# EAGLE board clock_PC_and_instruction_reg (EAGLE 9.6.1), part 1 of 2
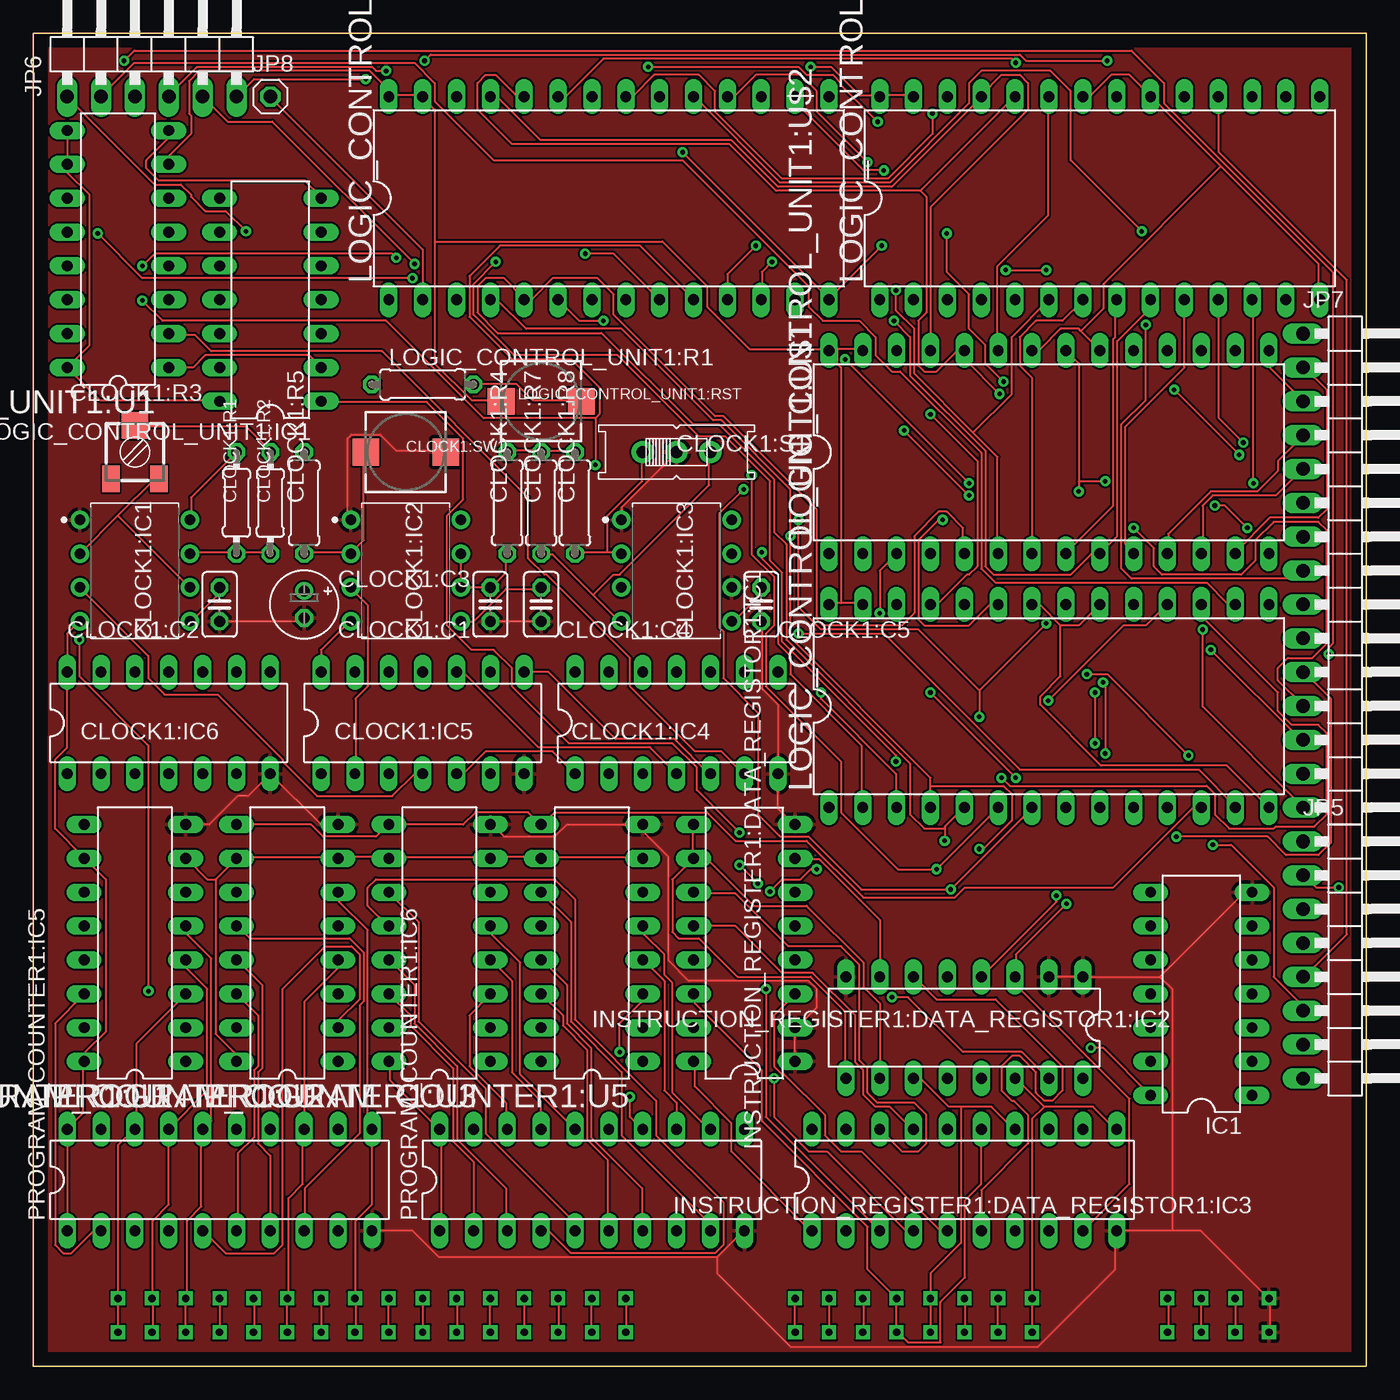
[diagram p0: board, top side]
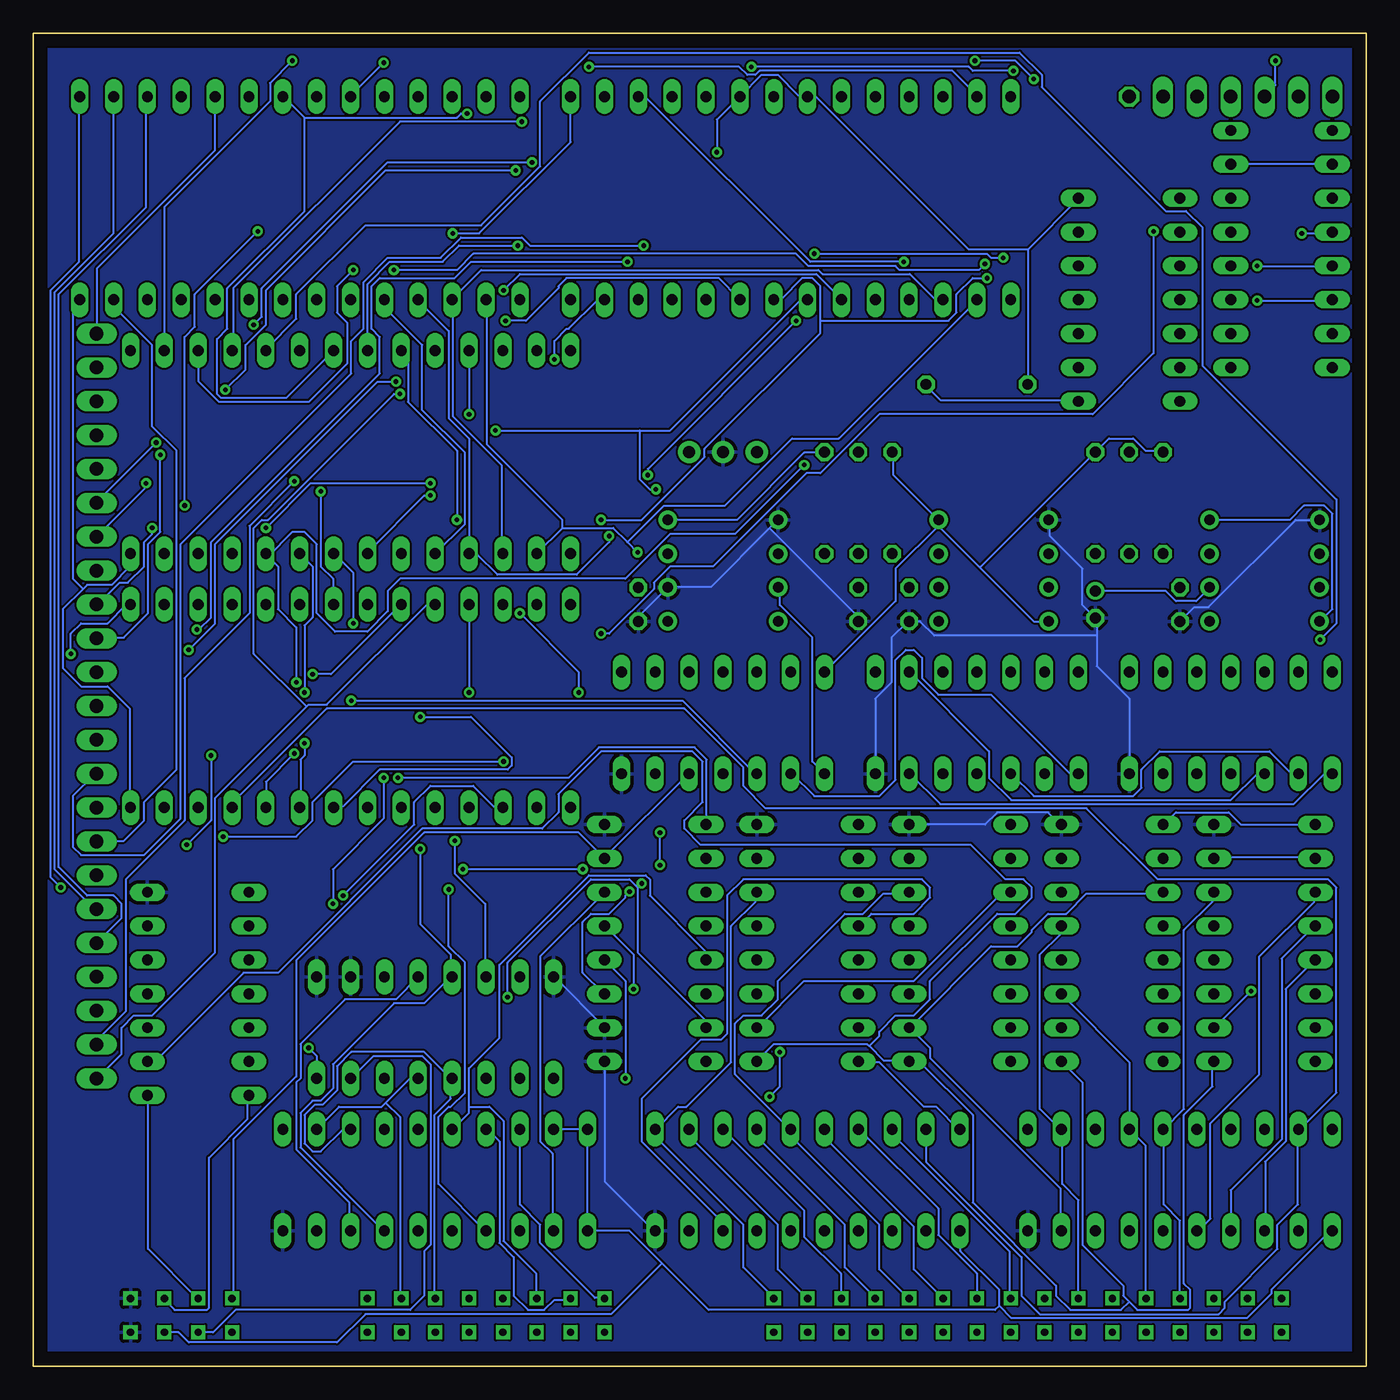
[diagram p1: board, bottom side, seen from below]

Size 100 x 100 mm. Coordinates in mm from the lower left corner, seen from the top.
Copper layers (1*16): Top 0.035mm / dielectric 1.5mm / Bottom 0.035mm
Design rules "default": minimum track width 6mil, minimum drill 0.35mm, track to track 6mil, track to pad 6mil, pad to pad 6mil, via to via 6mil, smd to smd 6mil, copper to edge 40mil, drill to drill 6mil, minimum pad ring 10mil, minimum via ring 8mil, stop-mask expansion 4mil, vias tented up to drill 0mil, thermal gap 10mil

## Footprints (pad centres in the part's own frame; a part is rotated, then mirrored left to right if it is on the bottom)
E2-5 = drill 0.813 pad 1.27: + -1.016,0 | drill 0.813 pad 1.27 octagon: - 1.016,0
C025-025X050 = drill 0.813 octagon: 1 -1.27,0; 2 1.27,0
DIP826W53P254L959H508Q8B = drill 0.786 pad 1.386: 1 -4.13,3.81; 2 -4.13,1.27; 3 -4.13,-1.27; 4 -4.13,-3.81; 5 4.13,-3.81; 6 4.13,-1.27; 7 4.13,1.27; 8 4.13,3.81
DIL14 = drill 0.813 long: 1 -7.62,-3.81; 2 -5.08,-3.81; 3 -2.54,-3.81; 4 0,-3.81; 5 2.54,-3.81; 6 5.08,-3.81; 7 7.62,-3.81; 8 7.62,3.81; 9 5.08,3.81; 10 2.54,3.81; 11 0,3.81; 12 -2.54,3.81; 13 -5.08,3.81; 14 -7.62,3.81
0204/7 = drill 0.813 octagon: 1 -3.81,0; 2 3.81,0
RTRIM3314J = smd 1.3 x 2: 1 1.8,-2; 3 -1.8,-2 | smd 2 x 2: 2 0,2
0207/7 = drill 0.813 octagon: 1 -3.81,0; 2 3.81,0
EG1218 = drill 0.9 pad 1.676: O -2.54,0; P 0,0; S 2.54,0
PUSHBUTTON_SMD_SJ = smd 2 x 2: P$1 3,0; P$2 -3,0
DIL16 = drill 0.813 long: 1 -8.89,-3.81; 2 -6.35,-3.81; 3 -3.81,-3.81; 4 -1.27,-3.81; 5 1.27,-3.81; 6 3.81,-3.81; 7 6.35,-3.81; 8 8.89,-3.81; 9 8.89,3.81; 10 6.35,3.81; 11 3.81,3.81; 12 1.27,3.81; 13 -1.27,3.81; 14 -3.81,3.81; 15 -6.35,3.81; 16 -8.89,3.81
DIL20 = drill 0.813 long: 1 -11.43,-3.81; 2 -8.89,-3.81; 3 -6.35,-3.81; 4 -3.81,-3.81; 5 -1.27,-3.81; 6 1.27,-3.81; 7 3.81,-3.81; 8 6.35,-3.81; 9 8.89,-3.81; 10 11.43,-3.81; 11 11.43,3.81; 12 8.89,3.81; 13 6.35,3.81; 14 3.81,3.81; 15 1.27,3.81; 16 -1.27,3.81; 17 -3.81,3.81; 18 -6.35,3.81; 19 -8.89,3.81; 20 -11.43,3.81
1X08/90 = drill 1.016 long: 1 -8.89,-3.81; 2 -6.35,-3.81; 3 -3.81,-3.81; 4 -1.27,-3.81; 5 1.27,-3.81; 6 3.81,-3.81; 7 6.35,-3.81; 8 8.89,-3.81
1X06/90 = drill 1.016 long: 1 -6.35,-3.81; 2 -3.81,-3.81; 3 -1.27,-3.81; 4 1.27,-3.81; 5 3.81,-3.81; 6 6.35,-3.81
1X15/90 = drill 1.016 long: 1 -17.78,-3.81; 2 -15.24,-3.81; 3 -12.7,-3.81; 4 -10.16,-3.81; 5 -7.62,-3.81; 6 -5.08,-3.81; 7 -2.54,-3.81; 8 0,-3.81; 9 2.54,-3.81; 10 5.08,-3.81; 11 7.62,-3.81; 12 10.16,-3.81; 13 12.7,-3.81; 14 15.24,-3.81; 15 17.78,-3.81
1X01 = drill 1.016 octagon: 1 0,0
DIL28-6 = drill 0.813 long: 1 -16.51,-7.62; 2 -13.97,-7.62; 3 -11.43,-7.62; 4 -8.89,-7.62; 5 -6.35,-7.62; 6 -3.81,-7.62; 7 -1.27,-7.62; 8 1.27,-7.62; 9 3.81,-7.62; 10 6.35,-7.62; 11 8.89,-7.62; 12 11.43,-7.62; 13 13.97,-7.62; 14 16.51,-7.62; 15 16.51,7.62; 16 13.97,7.62; 17 11.43,7.62; 18 8.89,7.62; 19 6.35,7.62; 20 3.81,7.62; 21 1.27,7.62; 22 -1.27,7.62; 23 -3.81,7.62; 24 -6.35,7.62; 25 -8.89,7.62; 26 -11.43,7.62; 27 -13.97,7.62; 28 -16.51,7.62
PORT_FOOTPT = drill 0.55 square: A0 6.35,2.54; A1 8.89,2.54; A2 11.43,2.54; A3 13.97,2.54; A4 16.51,2.54; A5 19.05,2.54; A6 21.59,2.54; A7 24.13,2.54; A8 26.67,2.54; A9 29.21,2.54; A10 31.75,2.54; A11 34.29,2.54; A12 36.83,2.54; A13 39.37,2.54; A14 41.91,2.54; A15 44.45,2.54; A16 6.35,5.08; A17 8.89,5.08; A18 11.43,5.08; A19 13.97,5.08; A20 16.51,5.08; A21 19.05,5.08; A22 21.59,5.08; A23 24.13,5.08; A24 26.67,5.08; A25 29.21,5.08; A26 31.75,5.08; A27 34.29,5.08; A28 36.83,5.08; A29 39.37,5.08; A30 41.91,5.08; A31 44.45,5.08; CLK 85.09,2.54; CLK1 85.09,5.08; D0 57.15,2.54; D1 59.69,2.54; D2 62.23,2.54; D3 64.77,2.54; D4 67.31,2.54; D5 69.85,2.54; D6 72.39,2.54; D7 74.93,2.54; D8 57.15,5.08; D9 59.69,5.08; D10 62.23,5.08; D11 64.77,5.08; D12 67.31,5.08; D13 69.85,5.08; D14 72.39,5.08; D15 74.93,5.08; GND 92.71,2.54; GND1 92.71,5.08; RST 87.63,2.54; RST1 87.63,5.08; VCC 90.17,2.54; VCC1 90.17,5.08

## Placement (x,y rotation side)
CLOCK1:C1  1uF  [E2-5]  20.32,57.15 270 top
CLOCK1:C2  0.01uF  [C025-025X050]  13.97,57.15 270 top
CLOCK1:C3  0.1uF  [C025-025X050]  34.29,57.15 270 top
CLOCK1:C4  0.01uF  [C025-025X050]  38.1,57.15 270 top
CLOCK1:C5  0.01uF  [C025-025X050]  54.61,57.15 270 top
CLOCK1:IC1  NE555_DIP  [DIP826W53P254L959H508Q8B]  7.62,59.69 0 top
CLOCK1:IC2  NE555_DIP  [DIP826W53P254L959H508Q8B]  27.94,59.69 0 top
CLOCK1:IC3  NE555_DIP  [DIP826W53P254L959H508Q8B]  48.26,59.69 0 top
CLOCK1:IC4  74LS04N  [DIL14]  48.26,48.26 0 top
CLOCK1:IC5  74LS08N  [DIL14]  29.21,48.26 0 top
CLOCK1:IC6  74LS32N  [DIL14]  10.16,48.26 0 top
CLOCK1:R1  1k  [0204/7]  15.24,64.77 90 top
CLOCK1:R2  1k  [0204/7]  17.78,64.77 270 top
CLOCK1:R3  1M  [RTRIM3314J]  7.62,68.58 0 top
CLOCK1:R4  1M  [0207/7]  35.56,64.77 90 top
CLOCK1:R5  1k  [0207/7]  20.32,64.77 90 top
CLOCK1:R7  1M  [0207/7]  38.1,64.77 90 top
CLOCK1:R8  1M  [0207/7]  40.64,64.77 90 top
CLOCK1:S1  [EG1218]  48.26,68.58 0 top
CLOCK1:SW1  [PUSHBUTTON_SMD_SJ]  27.94,68.58 0 top
IC1  74LS04N  [DIL14]  87.63,27.94 90 top
INSTRUCTION_REGISTER1:DATA_REGISTOR1:IC1  74LS173N  [DIL16]  53.34,31.75 90 top
INSTRUCTION_REGISTER1:DATA_REGISTOR1:IC2  74LS173N  [DIL16]  69.85,25.4 180 top
INSTRUCTION_REGISTER1:DATA_REGISTOR1:IC3  74LS245N  [DIL20]  69.85,13.97 0 top
JP5  [1X08/90]  99.06,30.48 270 top
JP6  [1X06/90]  8.89,99.06 0 top
JP7  [1X15/90]  99.06,59.69 270 top
JP8  [1X01]  17.78,95.25 0 top
LOGIC_CONTROL_UNIT1:IC1  74LS04N  [DIL14]  17.78,80.01 90 top
LOGIC_CONTROL_UNIT1:R1  1M  [0207/7]  29.21,73.66 0 top
LOGIC_CONTROL_UNIT1:RST  [PUSHBUTTON_SMD_SJ]  38.1,72.39 0 top
LOGIC_CONTROL_UNIT1:U1  74LS161N  [DIL16]  6.35,83.82 90 top
LOGIC_CONTROL_UNIT1:U$1  AT28C256-28DIP  [DIL28-6]  76.2,49.53 0 top
LOGIC_CONTROL_UNIT1:U$2  AT28C256-28DIP  [DIL28-6]  76.2,68.58 0 top
LOGIC_CONTROL_UNIT1:U$3  AT28C256-28DIP  [DIL28-6]  80.01,87.63 0 top
LOGIC_CONTROL_UNIT1:U$4  AT28C256-28DIP  [DIL28-6]  43.18,87.63 0 top
PROGRAM_COUNTER1:IC5  74LS245N  [DIL20]  13.97,13.97 0 top
PROGRAM_COUNTER1:IC6  74LS245N  [DIL20]  41.91,13.97 0 top
PROGRAM_COUNTER1:U1  74LS161N  [DIL16]  7.62,31.75 90 top
PROGRAM_COUNTER1:U2  74LS161N  [DIL16]  19.05,31.75 90 top
PROGRAM_COUNTER1:U3  74LS161N  [DIL16]  30.48,31.75 90 top
PROGRAM_COUNTER1:U5  74LS161N  [DIL16]  41.91,31.75 90 top
U$1  PORT_BOARD  [PORT_FOOTPT]  0,0 0 top

## Library data of the parts
CLOCK1:C1-CLOCK1:C5 = resistor; SPICEPREFIX: C
CLOCK1:IC1 = IC_Clock-Timing; CATEGORY: IC_Clock-Timing; CURRENT-SUPPLY: 10mA; DESCRIPTION: IC OSC SINGLE TIMER 100KHZ 8-DIP; FREQUENCY: 100kHz; MANUFACTURER: Texas Instruments; MPN: NE555P; OPERATING_TEMP: 0°C to 70°C; PART_STATUS: Active; ROHS_COMPLIANT: ROHS3 Compliant; SPICEMODEL: NE555; SPICEPREFIX: X; SUB-CATEGORY: Timer
CLOCK1:IC2 CLOCK1:IC3 = IC_Clock-Timing; CATEGORY: IC_Clock-Timing; CURRENT-SUPPLY: 10mA; DESCRIPTION: IC OSC SINGLE TIMER 100KHZ 8-DIP; FREQUENCY: 100kHz; MANUFACTURER: Texas Instruments; MPN: NE555P; OPERATING_TEMP: 0°C to 70°C; PART_STATUS: Active; ROHS_COMPLIANT: ROHS3 Compliant; SUB-CATEGORY: Timer
CLOCK1:IC4 CLOCK1:IC6 IC1 INSTRUCTION_REGISTER1:DATA_REGISTOR1:IC1-INSTRUCTION_REGISTER1:DATA_REGISTOR1:IC3 LOGIC_CONTROL_UNIT1:IC1 PROGRAM_COUNTER1:IC5 PROGRAM_COUNTER1:IC6 = 74xx-eu
CLOCK1:IC5 = 74xx-eu; SPICEPREFIX: J
CLOCK1:R1 CLOCK1:R2 = resistor; SPICEPREFIX: R
CLOCK1:R3 = resistor; SPICEPREFIX: X
CLOCK1:R4 CLOCK1:R5 CLOCK1:R7 CLOCK1:R8 LOGIC_CONTROL_UNIT1:R1 = resistor
CLOCK1:S1 = adafruit
CLOCK1:SW1 LOGIC_CONTROL_UNIT1:RST = adafruit; SPICEPREFIX: B
JP5-JP8 = pinhead
LOGIC_CONTROL_UNIT1:U1 PROGRAM_COUNTER1:U1-PROGRAM_COUNTER1:U3 PROGRAM_COUNTER1:U5 = oldchips
LOGIC_CONTROL_UNIT1:U$1-LOGIC_CONTROL_UNIT1:U$4 = atmel-custom
U$1 = stack_interface

## Nets
!II: INSTRUCTION_REGISTER1:DATA_REGISTOR1:IC1.9 INSTRUCTION_REGISTER1:DATA_REGISTOR1:IC1.10 INSTRUCTION_REGISTER1:DATA_REGISTOR1:IC2.9 INSTRUCTION_REGISTER1:DATA_REGISTOR1:IC2.10 LOGIC_CONTROL_UNIT1:U$1.17
!PCL: LOGIC_CONTROL_UNIT1:U$1.12 PROGRAM_COUNTER1:U1.9 PROGRAM_COUNTER1:U2.9 PROGRAM_COUNTER1:U3.9 PROGRAM_COUNTER1:U5.9
!PCO: LOGIC_CONTROL_UNIT1:U$1.11 PROGRAM_COUNTER1:IC5.19 PROGRAM_COUNTER1:IC6.19
ADD: JP5.1 LOGIC_CONTROL_UNIT1:U$3.13
AI: JP7.15 LOGIC_CONTROL_UNIT1:U$4.12
AND: JP5.3 LOGIC_CONTROL_UNIT1:U$3.16
AO: JP7.14 LOGIC_CONTROL_UNIT1:U$4.11
BI: JP7.13 LOGIC_CONTROL_UNIT1:U$4.15
BO: JP7.12 LOGIC_CONTROL_UNIT1:U$4.13
CF: JP5.6 LOGIC_CONTROL_UNIT1:U$1.23 LOGIC_CONTROL_UNIT1:U$2.23 LOGIC_CONTROL_UNIT1:U$3.23 LOGIC_CONTROL_UNIT1:U$4.23
CI: JP7.11 LOGIC_CONTROL_UNIT1:U$4.17
CLOCK1:N$1: CLOCK1:IC1.7 CLOCK1:R1.1 CLOCK1:R2.2
CLOCK1:N$2: CLOCK1:R2.1 CLOCK1:R3.2
CLOCK1:N$3: CLOCK1:C1.+ CLOCK1:IC1.2 CLOCK1:IC1.6 CLOCK1:R3.1
CLOCK1:N$4: CLOCK1:C3.1 CLOCK1:IC2.6 CLOCK1:IC2.7 CLOCK1:R4.1
CLOCK1:N$5: CLOCK1:C2.1 CLOCK1:IC1.5
CLOCK1:N$6: CLOCK1:IC1.3 CLOCK1:IC5.4
CLOCK1:N$7: CLOCK1:IC4.2 CLOCK1:IC5.1
CLOCK1:N$8: CLOCK1:IC2.3 CLOCK1:IC5.2
CLOCK1:N$9: CLOCK1:IC3.3 CLOCK1:IC4.1 CLOCK1:IC5.5
CLOCK1:N$10: CLOCK1:IC5.6 CLOCK1:IC6.1
CLOCK1:N$11: CLOCK1:IC5.3 CLOCK1:IC6.2
CLOCK1:N$12: CLOCK1:IC4.4 CLOCK1:IC5.10
CLOCK1:N$13: CLOCK1:IC5.9 CLOCK1:IC6.3
CLOCK1:N$14: CLOCK1:C4.1 CLOCK1:IC2.5
CLOCK1:N$15: CLOCK1:IC2.2 CLOCK1:R5.1 CLOCK1:SW1.P$2
CLOCK1:N$17: CLOCK1:IC3.2 CLOCK1:R8.1 CLOCK1:S1.O
CLOCK1:N$18: CLOCK1:IC3.4 CLOCK1:R7.1 CLOCK1:S1.S
CLOCK1:N$19: CLOCK1:C5.1 CLOCK1:IC3.5
CO: JP7.10 LOGIC_CONTROL_UNIT1:U$4.16
D2A_HI_IN: JP6.6 LOGIC_CONTROL_UNIT1:U$2.16
D2A_LO_IN: JP6.5 LOGIC_CONTROL_UNIT1:U$2.17
D2A_OUT: JP6.4 LOGIC_CONTROL_UNIT1:U$2.18
DI: JP7.9 LOGIC_CONTROL_UNIT1:U$4.19
DO: JP7.8 LOGIC_CONTROL_UNIT1:U$4.18
EI: JP7.7 LOGIC_CONTROL_UNIT1:U$3.12
EO: JP7.6 LOGIC_CONTROL_UNIT1:U$3.11
GND: CLOCK1:C1.- CLOCK1:C2.2 CLOCK1:C3.2 CLOCK1:C4.2 CLOCK1:C5.2 CLOCK1:IC1.1 CLOCK1:IC2.1 CLOCK1:IC3.1 CLOCK1:IC3.6 CLOCK1:IC4.7 CLOCK1:IC5.7 CLOCK1:IC6.7 CLOCK1:S1.P CLOCK1:SW1.P$1 IC1.7 INSTRUCTION_REGISTER1:DATA_REGISTOR1:IC1.1 INSTRUCTION_REGISTER1:DATA_REGISTOR1:IC1.2 INSTRUCTION_REGISTER1:DATA_REGISTOR1:IC1.8 INSTRUCTION_REGISTER1:DATA_REGISTOR1:IC2.1 INSTRUCTION_REGISTER1:DATA_REGISTOR1:IC2.2 INSTRUCTION_REGISTER1:DATA_REGISTOR1:IC2.8 INSTRUCTION_REGISTER1:DATA_REGISTOR1:IC3.10 PROGRAM_COUNTER1:IC5.10 PROGRAM_COUNTER1:IC6.10 PROGRAM_COUNTER1:U1.8 PROGRAM_COUNTER1:U2.8 PROGRAM_COUNTER1:U3.8 PROGRAM_COUNTER1:U5.8 U$1.GND U$1.GND1
HALT: CLOCK1:IC4.3 LOGIC_CONTROL_UNIT1:U$1.18
HI: JP7.5 LOGIC_CONTROL_UNIT1:U$2.12
HL_TO_ADDR: JP7.1 LOGIC_CONTROL_UNIT1:U$3.19
HO: JP7.4 LOGIC_CONTROL_UNIT1:U$2.11
IRO0: INSTRUCTION_REGISTER1:DATA_REGISTOR1:IC1.6 INSTRUCTION_REGISTER1:DATA_REGISTOR1:IC3.2
IRO7: INSTRUCTION_REGISTER1:DATA_REGISTOR1:IC2.3 INSTRUCTION_REGISTER1:DATA_REGISTOR1:IC3.9 LOGIC_CONTROL_UNIT1:U$1.25 LOGIC_CONTROL_UNIT1:U$2.25 LOGIC_CONTROL_UNIT1:U$3.25 LOGIC_CONTROL_UNIT1:U$4.25
LI: JP7.3 LOGIC_CONTROL_UNIT1:U$2.15
LO: JP7.2 LOGIC_CONTROL_UNIT1:U$2.13
LOGIC_CONTROL_UNIT1:GND: LOGIC_CONTROL_UNIT1:IC1.7 LOGIC_CONTROL_UNIT1:R1.1 LOGIC_CONTROL_UNIT1:U1.8 LOGIC_CONTROL_UNIT1:U$1.14 LOGIC_CONTROL_UNIT1:U$1.20 LOGIC_CONTROL_UNIT1:U$1.22 LOGIC_CONTROL_UNIT1:U$2.14 LOGIC_CONTROL_UNIT1:U$2.20 LOGIC_CONTROL_UNIT1:U$2.22 LOGIC_CONTROL_UNIT1:U$3.14 LOGIC_CONTROL_UNIT1:U$3.20 LOGIC_CONTROL_UNIT1:U$3.22 LOGIC_CONTROL_UNIT1:U$4.14 LOGIC_CONTROL_UNIT1:U$4.20 LOGIC_CONTROL_UNIT1:U$4.22
LOGIC_CONTROL_UNIT1:N$1: LOGIC_CONTROL_UNIT1:U1.14 LOGIC_CONTROL_UNIT1:U$1.10 LOGIC_CONTROL_UNIT1:U$2.10 LOGIC_CONTROL_UNIT1:U$3.10 LOGIC_CONTROL_UNIT1:U$4.10
LOGIC_CONTROL_UNIT1:N$2: LOGIC_CONTROL_UNIT1:IC1.2 LOGIC_CONTROL_UNIT1:U1.1
LOGIC_CONTROL_UNIT1:N$10: LOGIC_CONTROL_UNIT1:U1.13 LOGIC_CONTROL_UNIT1:U$1.9 LOGIC_CONTROL_UNIT1:U$2.9 LOGIC_CONTROL_UNIT1:U$3.9 LOGIC_CONTROL_UNIT1:U$4.9
LOGIC_CONTROL_UNIT1:N$11: LOGIC_CONTROL_UNIT1:U1.12 LOGIC_CONTROL_UNIT1:U$1.8 LOGIC_CONTROL_UNIT1:U$2.8 LOGIC_CONTROL_UNIT1:U$3.8 LOGIC_CONTROL_UNIT1:U$4.8
LOGIC_CONTROL_UNIT1:N$12: LOGIC_CONTROL_UNIT1:U1.11
LOGIC_CONTROL_UNIT1:VCC: LOGIC_CONTROL_UNIT1:IC1.14 LOGIC_CONTROL_UNIT1:RST.P$2 LOGIC_CONTROL_UNIT1:U1.7 LOGIC_CONTROL_UNIT1:U1.9 LOGIC_CONTROL_UNIT1:U1.10 LOGIC_CONTROL_UNIT1:U1.16 LOGIC_CONTROL_UNIT1:U$1.27 LOGIC_CONTROL_UNIT1:U$1.28 LOGIC_CONTROL_UNIT1:U$2.27 LOGIC_CONTROL_UNIT1:U$2.28 LOGIC_CONTROL_UNIT1:U$3.27 LOGIC_CONTROL_UNIT1:U$3.28 LOGIC_CONTROL_UNIT1:U$4.27 LOGIC_CONTROL_UNIT1:U$4.28
M_READ: JP6.2 LOGIC_CONTROL_UNIT1:U$1.16
M_WRITE: JP6.3 LOGIC_CONTROL_UNIT1:U$1.15
MAR_IN: JP6.1 LOGIC_CONTROL_UNIT1:U$1.13
N$1: PROGRAM_COUNTER1:IC6.11 PROGRAM_COUNTER1:U5.6 U$1.A15 U$1.A31
N$2: PROGRAM_COUNTER1:IC6.12 PROGRAM_COUNTER1:U5.5 U$1.A14 U$1.A30
N$3: PROGRAM_COUNTER1:IC6.13 PROGRAM_COUNTER1:U5.4 U$1.A13 U$1.A29
N$4: PROGRAM_COUNTER1:IC6.14 PROGRAM_COUNTER1:U5.3 U$1.A12 U$1.A28
N$5: PROGRAM_COUNTER1:IC6.15 PROGRAM_COUNTER1:U3.6 U$1.A11 U$1.A27
N$6: PROGRAM_COUNTER1:IC6.16 PROGRAM_COUNTER1:U3.5 U$1.A10 U$1.A26
N$7: PROGRAM_COUNTER1:IC6.17 PROGRAM_COUNTER1:U3.4 U$1.A9 U$1.A25
N$8: PROGRAM_COUNTER1:IC6.18 PROGRAM_COUNTER1:U3.3 U$1.A8 U$1.A24
N$9: PROGRAM_COUNTER1:IC5.11 PROGRAM_COUNTER1:U2.6 U$1.A7 U$1.A23
N$10: PROGRAM_COUNTER1:IC5.12 PROGRAM_COUNTER1:U2.5 U$1.A6 U$1.A22
N$11: PROGRAM_COUNTER1:IC5.13 PROGRAM_COUNTER1:U2.4 U$1.A5 U$1.A21
N$12: PROGRAM_COUNTER1:IC5.14 PROGRAM_COUNTER1:U2.3 U$1.A4 U$1.A20
N$13: PROGRAM_COUNTER1:IC5.15 PROGRAM_COUNTER1:U1.6 U$1.A3 U$1.A19
N$14: PROGRAM_COUNTER1:IC5.16 PROGRAM_COUNTER1:U1.5 U$1.A2 U$1.A18
N$15: PROGRAM_COUNTER1:IC5.17 PROGRAM_COUNTER1:U1.4 U$1.A1 U$1.A17
N$16: PROGRAM_COUNTER1:IC5.18 PROGRAM_COUNTER1:U1.3 U$1.A0 U$1.A16
N$17: INSTRUCTION_REGISTER1:DATA_REGISTOR1:IC1.11 INSTRUCTION_REGISTER1:DATA_REGISTOR1:IC3.18 U$1.D0 U$1.D8
N$18: INSTRUCTION_REGISTER1:DATA_REGISTOR1:IC1.12 INSTRUCTION_REGISTER1:DATA_REGISTOR1:IC3.17 U$1.D1 U$1.D9
N$19: INSTRUCTION_REGISTER1:DATA_REGISTOR1:IC1.13 INSTRUCTION_REGISTER1:DATA_REGISTOR1:IC3.16 U$1.D2 U$1.D10
N$20: INSTRUCTION_REGISTER1:DATA_REGISTOR1:IC1.14 INSTRUCTION_REGISTER1:DATA_REGISTOR1:IC3.15 U$1.D3 U$1.D11
N$21: INSTRUCTION_REGISTER1:DATA_REGISTOR1:IC2.11 INSTRUCTION_REGISTER1:DATA_REGISTOR1:IC3.14 U$1.D4 U$1.D12
N$22: INSTRUCTION_REGISTER1:DATA_REGISTOR1:IC2.12 INSTRUCTION_REGISTER1:DATA_REGISTOR1:IC3.13 U$1.D5 U$1.D13
N$23: INSTRUCTION_REGISTER1:DATA_REGISTOR1:IC2.13 INSTRUCTION_REGISTER1:DATA_REGISTOR1:IC3.12 U$1.D6 U$1.D14
N$24: INSTRUCTION_REGISTER1:DATA_REGISTOR1:IC2.14 INSTRUCTION_REGISTER1:DATA_REGISTOR1:IC3.11 U$1.D7 U$1.D15
N$25: CLOCK1:IC4.5 CLOCK1:IC5.8 INSTRUCTION_REGISTER1:DATA_REGISTOR1:IC1.7 INSTRUCTION_REGISTER1:DATA_REGISTOR1:IC2.7 U$1.CLK U$1.CLK1
N$26: IC1.1 INSTRUCTION_REGISTER1:DATA_REGISTOR1:IC1.15 INSTRUCTION_REGISTER1:DATA_REGISTOR1:IC2.15 LOGIC_CONTROL_UNIT1:IC1.1 LOGIC_CONTROL_UNIT1:R1.2 LOGIC_CONTROL_UNIT1:RST.P$1 U$1.RST U$1.RST1
N$27: IC1.2 PROGRAM_COUNTER1:U1.1 PROGRAM_COUNTER1:U2.1 PROGRAM_COUNTER1:U3.1 PROGRAM_COUNTER1:U5.1
N$28: INSTRUCTION_REGISTER1:DATA_REGISTOR1:IC2.4 INSTRUCTION_REGISTER1:DATA_REGISTOR1:IC3.8 LOGIC_CONTROL_UNIT1:U$1.3 LOGIC_CONTROL_UNIT1:U$2.3 LOGIC_CONTROL_UNIT1:U$3.3 LOGIC_CONTROL_UNIT1:U$4.3
N$29: INSTRUCTION_REGISTER1:DATA_REGISTOR1:IC2.5 INSTRUCTION_REGISTER1:DATA_REGISTOR1:IC3.7 LOGIC_CONTROL_UNIT1:U$1.4 LOGIC_CONTROL_UNIT1:U$2.4 LOGIC_CONTROL_UNIT1:U$3.4 LOGIC_CONTROL_UNIT1:U$4.4
N$30: INSTRUCTION_REGISTER1:DATA_REGISTOR1:IC2.6 INSTRUCTION_REGISTER1:DATA_REGISTOR1:IC3.6 LOGIC_CONTROL_UNIT1:U$1.5 LOGIC_CONTROL_UNIT1:U$2.5 LOGIC_CONTROL_UNIT1:U$3.5 LOGIC_CONTROL_UNIT1:U$4.5
N$31: INSTRUCTION_REGISTER1:DATA_REGISTOR1:IC1.3 INSTRUCTION_REGISTER1:DATA_REGISTOR1:IC3.5 LOGIC_CONTROL_UNIT1:U$1.6 LOGIC_CONTROL_UNIT1:U$2.6 LOGIC_CONTROL_UNIT1:U$3.6 LOGIC_CONTROL_UNIT1:U$4.6
N$32: INSTRUCTION_REGISTER1:DATA_REGISTOR1:IC1.4 INSTRUCTION_REGISTER1:DATA_REGISTOR1:IC3.4 LOGIC_CONTROL_UNIT1:U$1.7 LOGIC_CONTROL_UNIT1:U$2.7 LOGIC_CONTROL_UNIT1:U$3.7 LOGIC_CONTROL_UNIT1:U$4.7
N$33: INSTRUCTION_REGISTER1:DATA_REGISTOR1:IC1.5 INSTRUCTION_REGISTER1:DATA_REGISTOR1:IC3.3
N$34: CLOCK1:IC4.6 LOGIC_CONTROL_UNIT1:U1.2
NF: JP5.7 LOGIC_CONTROL_UNIT1:U$1.21 LOGIC_CONTROL_UNIT1:U$2.21 LOGIC_CONTROL_UNIT1:U$3.21 LOGIC_CONTROL_UNIT1:U$4.21
OR: JP5.4 LOGIC_CONTROL_UNIT1:U$3.17
PC_AD: LOGIC_CONTROL_UNIT1:U$2.19 PROGRAM_COUNTER1:U1.2
PROGRAM_COUNTER1:N$2: PROGRAM_COUNTER1:IC5.5 PROGRAM_COUNTER1:U1.11 PROGRAM_COUNTER1:U2.2
PROGRAM_COUNTER1:N$3: PROGRAM_COUNTER1:IC5.9 PROGRAM_COUNTER1:U2.11 PROGRAM_COUNTER1:U3.2
PROGRAM_COUNTER1:N$4: PROGRAM_COUNTER1:IC6.5 PROGRAM_COUNTER1:U3.11 PROGRAM_COUNTER1:U5.2
PROGRAM_COUNTER1:N$23: PROGRAM_COUNTER1:IC5.2 PROGRAM_COUNTER1:U1.14
PROGRAM_COUNTER1:N$24: PROGRAM_COUNTER1:IC5.3 PROGRAM_COUNTER1:U1.13
PROGRAM_COUNTER1:N$25: PROGRAM_COUNTER1:IC5.4 PROGRAM_COUNTER1:U1.12
PROGRAM_COUNTER1:N$26: PROGRAM_COUNTER1:IC5.6 PROGRAM_COUNTER1:U2.14
PROGRAM_COUNTER1:N$27: PROGRAM_COUNTER1:IC5.7 PROGRAM_COUNTER1:U2.13
PROGRAM_COUNTER1:N$28: PROGRAM_COUNTER1:IC5.8 PROGRAM_COUNTER1:U2.12
PROGRAM_COUNTER1:N$30: PROGRAM_COUNTER1:IC6.2 PROGRAM_COUNTER1:U3.14
PROGRAM_COUNTER1:N$31: PROGRAM_COUNTER1:IC6.3 PROGRAM_COUNTER1:U3.13
PROGRAM_COUNTER1:N$32: PROGRAM_COUNTER1:IC6.4 PROGRAM_COUNTER1:U3.12
PROGRAM_COUNTER1:N$34: PROGRAM_COUNTER1:IC6.6 PROGRAM_COUNTER1:U5.14
PROGRAM_COUNTER1:N$35: PROGRAM_COUNTER1:IC6.7 PROGRAM_COUNTER1:U5.13
PROGRAM_COUNTER1:N$36: PROGRAM_COUNTER1:IC6.8 PROGRAM_COUNTER1:U5.12
PROGRAM_COUNTER1:N$37: PROGRAM_COUNTER1:IC6.9 PROGRAM_COUNTER1:U5.11
READY: JP8.1 LOGIC_CONTROL_UNIT1:U$1.2 LOGIC_CONTROL_UNIT1:U$2.2 LOGIC_CONTROL_UNIT1:U$3.2 LOGIC_CONTROL_UNIT1:U$4.2
SUB: JP5.2 LOGIC_CONTROL_UNIT1:U$3.15
VCC: CLOCK1:IC1.4 CLOCK1:IC1.8 CLOCK1:IC2.4 CLOCK1:IC2.8 CLOCK1:IC3.8 CLOCK1:IC4.14 CLOCK1:IC5.14 CLOCK1:IC6.14 CLOCK1:R1.2 CLOCK1:R4.2 CLOCK1:R5.2 CLOCK1:R7.2 CLOCK1:R8.2 IC1.14 INSTRUCTION_REGISTER1:DATA_REGISTOR1:IC1.16 INSTRUCTION_REGISTER1:DATA_REGISTOR1:IC2.16 INSTRUCTION_REGISTER1:DATA_REGISTOR1:IC3.1 INSTRUCTION_REGISTER1:DATA_REGISTOR1:IC3.19 INSTRUCTION_REGISTER1:DATA_REGISTOR1:IC3.20 PROGRAM_COUNTER1:IC5.1 PROGRAM_COUNTER1:IC5.20 PROGRAM_COUNTER1:IC6.1 PROGRAM_COUNTER1:IC6.20 PROGRAM_COUNTER1:U1.7 PROGRAM_COUNTER1:U1.10 PROGRAM_COUNTER1:U1.16 PROGRAM_COUNTER1:U2.7 PROGRAM_COUNTER1:U2.10 PROGRAM_COUNTER1:U2.16 PROGRAM_COUNTER1:U3.7 PROGRAM_COUNTER1:U3.10 PROGRAM_COUNTER1:U3.16 PROGRAM_COUNTER1:U5.7 PROGRAM_COUNTER1:U5.10 PROGRAM_COUNTER1:U5.16 U$1.VCC U$1.VCC1
XOR: JP5.5 LOGIC_CONTROL_UNIT1:U$3.18
ZF: JP5.8 LOGIC_CONTROL_UNIT1:U$1.24 LOGIC_CONTROL_UNIT1:U$2.24 LOGIC_CONTROL_UNIT1:U$3.24 LOGIC_CONTROL_UNIT1:U$4.24